# Altium PCB PCB1.PcbDoc
Units mm, origin at the board's own origin, x right, y up, seen from the top; angles counter-clockwise.
Board outline 80 x 60 mm, 2 copper layers (Top Layer, Bottom Layer); 42 components, 34 nets, 139 pads, 12 vias.
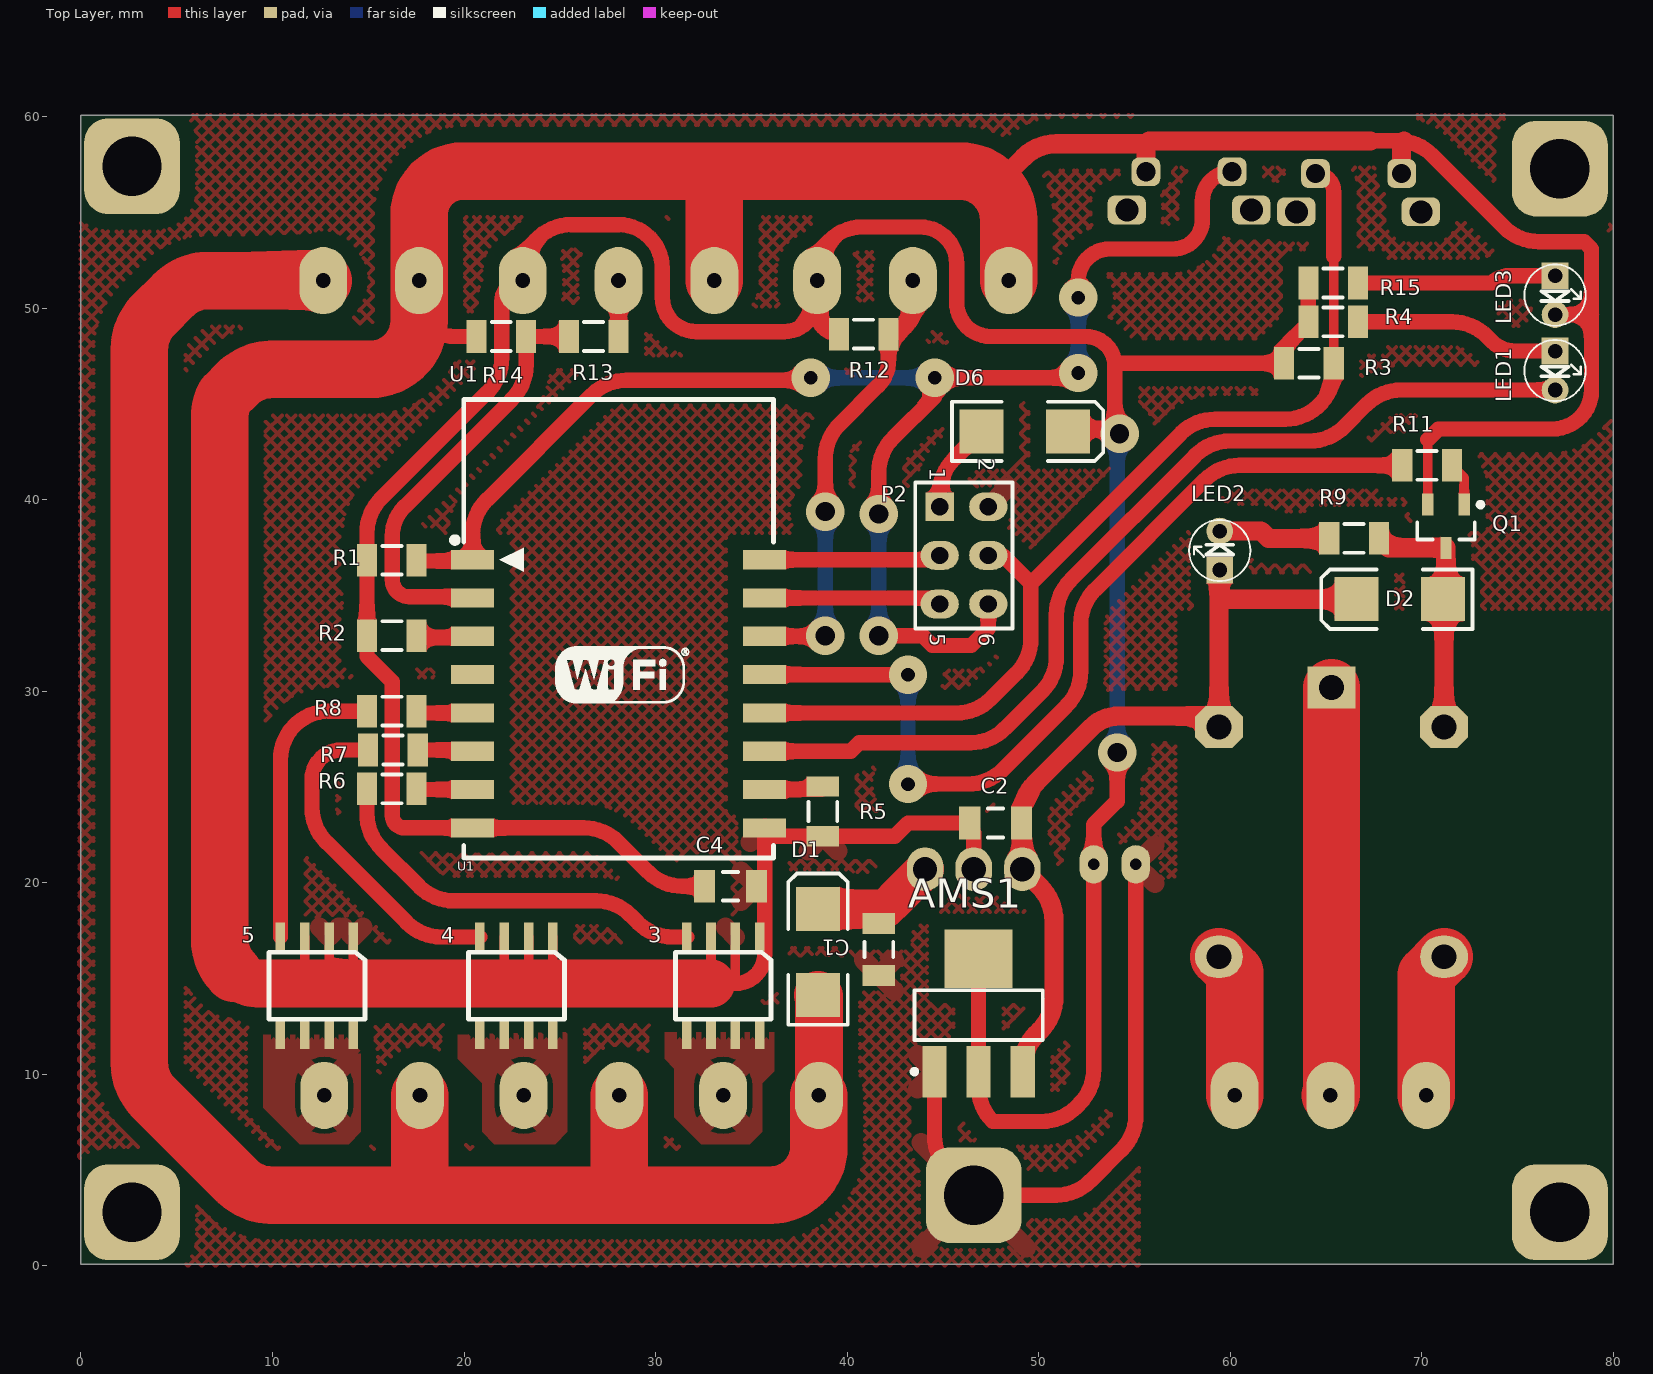
[diagram p0: Top Layer view]
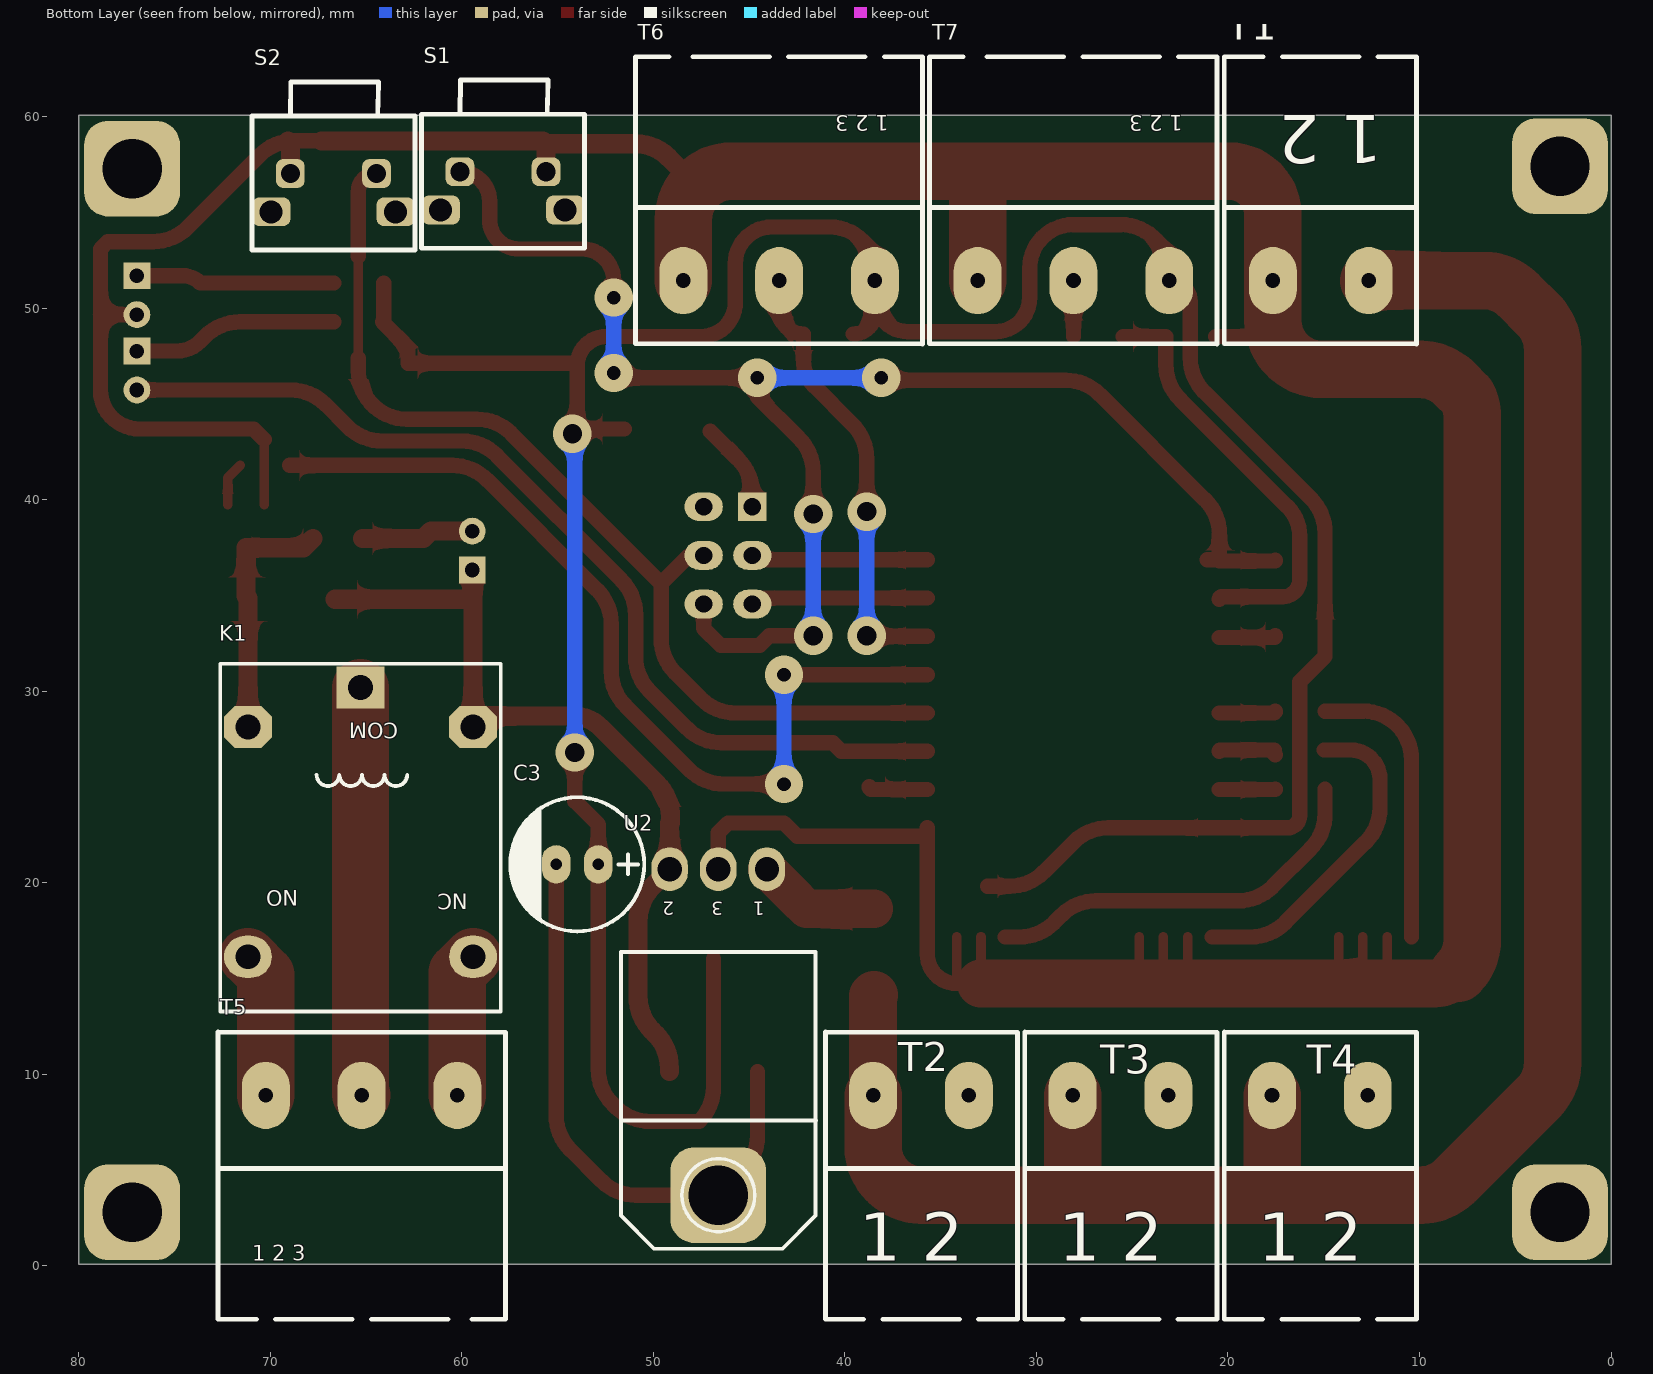
[diagram p1: Bottom Layer view, seen from below]
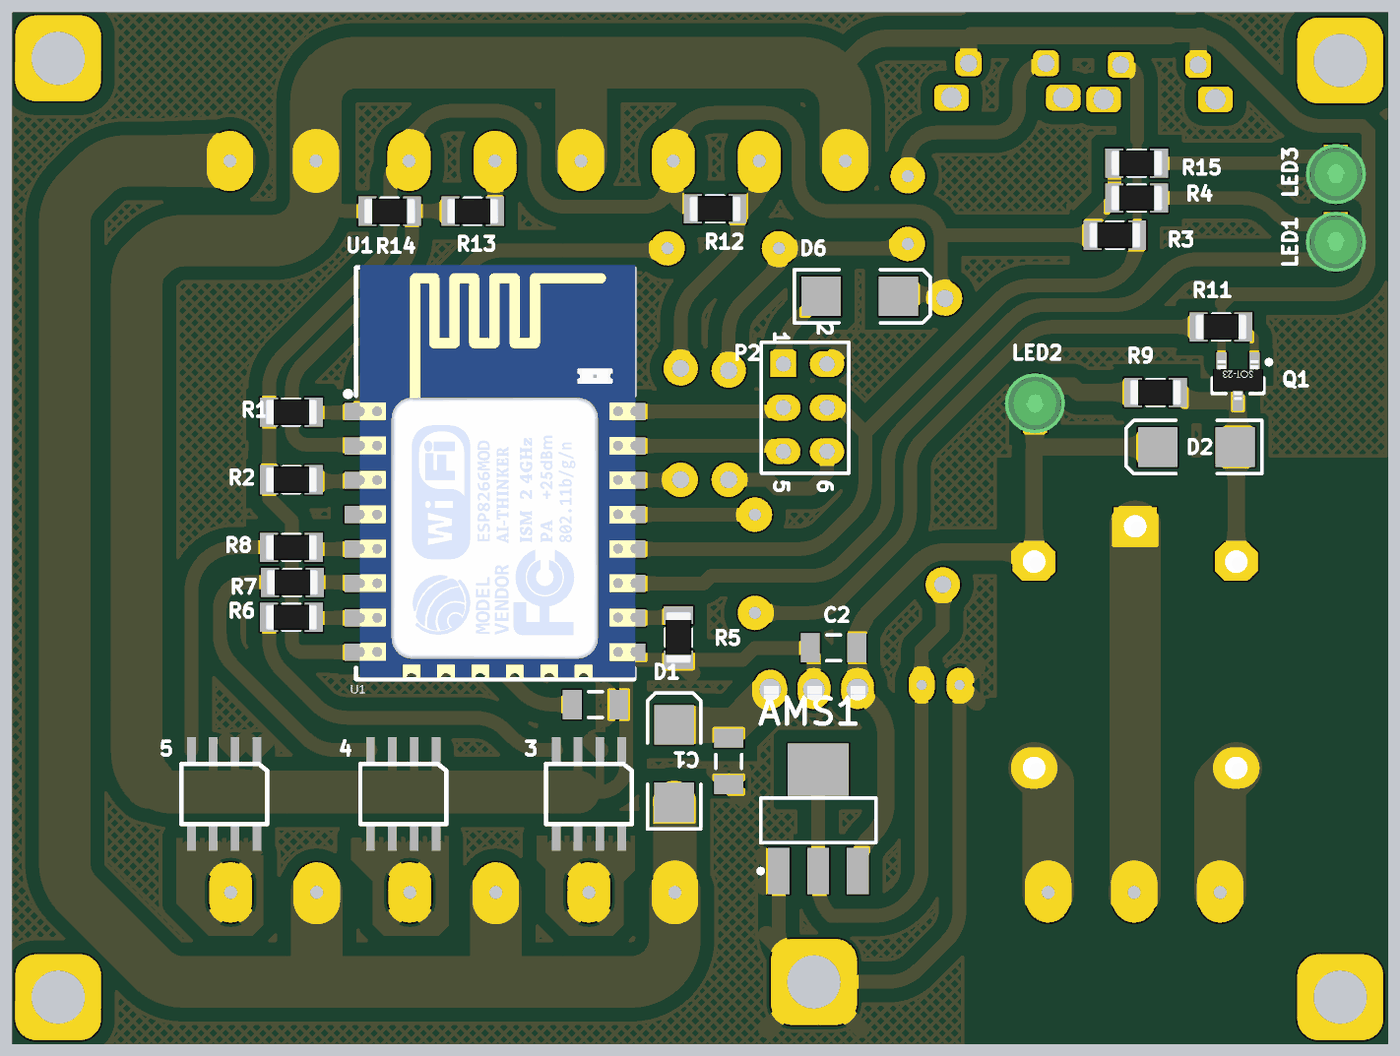
[diagram p2: 3D render of the assembled board from above, using the file's embedded part models]

## Layer stack, top to bottom
Top Solder: solder mask 0.0102, Solder Resist, Dk 3.5
Top Layer: signal copper 0.0356
Dielectric 1: dielectric 0.32, FR-4, Dk 4.8
Bottom Layer: signal copper 0.0356
Bottom Solder: solder mask 0.0102, Solder Resist, Dk 3.5

## Board outline
0,0.071 0,60.071 80,60.071 80,0.071

## Design rules (kind name [scope] priority, off if disabled: settings)
Clearance [All] p1: gap=0.8 ignorepadtopadclearanceinfootprint=FALSE
PolygonConnect [All] p1: connectstyle=Relief reliefconductorwidth=1 reliefentries=4 polygonreliefangle="45 Angle" airgapwidth=0.254
RoomDefinition Sheet2 [InComponentClass('Sheet2')] p1: confinementstyle=ConfineIn formatcopy=TRUE lockcomponents=FALSE outline -42.545,-58.928 8.255,-58.928 8.255,-33.528 -42.545,-33.528
RoutingVias [All] p1: holewidth=0.711 width=1.27 viastyle="Through Hole" minholewidth=0.711 minwidth=1.27 maxholewidth=0.711 maxwidth=1.27
SolderMaskExpansion [All] p1: expansion=0.102
Width [All] p1: maxlimit=3 minlimit=0.254 preferedwidth=1.5
30 further rules are at their usual default settings.

## Components (designator, comment, footprint, x,y, rotation, side; value= is the part's Value field where it differs from the comment)
3 "TMS4426CS" sop8 35.433,17.165 r270 top
4 "TMS4426CS" sop8 24.638,17.165 r270 top
5 "TMS4426CS" sop8 14.224,17.165 r270 top
AMS1 "AMS1117" AMS1117 46.863,13.081 r270 top
C1 "Cap Semi" C1206 41.656,16.51 r90 top value=100nf
C2 "Cap Semi" C1206 47.752,23.114 r0 top value=100nf
C3 "100uF" "cap 02" 53.975,20.955 r180 bottom
C4 "Cap Semi" C1206 33.909,19.812 r180 top value=100nf
D1 "" SMB 38.481,16.383 r90 top
D2 "1N4148" SMB 68.855,34.798 r180 top
D6 "D Schottky" SMB 49.276,43.561 r0 top
K1 "Relay" "Relay 18.85x15.35x15.70" 65.29,23.154 r0 bottom
LED1 "Red" LED-3mm 76.962,46.736 r270 top
LED2 "Red" LED-3mm 59.457,37.338 r90 top
LED3 "Red" LED-3mm 76.962,50.673 r270 top
P2 "Header 3X2" HDR2X3 44.831,39.624 r270 top
Q1 "BC817" SOT23_BEC_N 71.268,38.608 r270 top
R1 "10k" "RES 1206 (3216X08L)" 14.93,36.83 r0 top
R2 "10k" "RES 1206 (3216X08L)" 14.93,32.893 r0 top
R3 "10k" "RES 1206 (3216X08L)" 62.809,47.117 r0 top
R4 "1k" "RES 1206 (3216X08L)" 64.079,49.276 r0 top
R5 "1k" "RES 1206 (3216X08L)" 38.735,25.019 r270 top
R6 "330R" "RES 1206 (3216X08L)" 17.526,24.892 r180 top
R7 "330R" "RES 1206 (3216X08L)" 17.582,26.924 r180 top
R8 "330R" "RES 1206 (3216X08L)" 17.526,28.956 r180 top
R9 "1K" "RES 1206 (3216X08L)" 67.768,37.973 r180 top
R11 "330R" "RES 1206 (3216X08L)" 71.578,41.783 r180 top
R12 "10K" "RES 1206 (3216X08L)" 42.164,48.641 r180 top
R13 "10K" "RES 1206 (3216X08L)" 25.471,48.514 r0 top
R14 "10K" "RES 1206 (3216X08L)" 20.645,48.514 r0 top
R15 "1K" "RES 1206 (3216X08L)" 66.675,51.308 r180 top
S1 "Switch PB" button_R 53.601,60.118 r90 bottom
S2 "Switch PB" button_R 62.452,60.023 r90 bottom
T1 "Phoenix terminal" "phoenix terminal 2" 10.16,63.119 r0 bottom
T2 "Phoenix terminal" "phoenix terminal 2" 41.021,-2.794 r180 bottom
T3 "Phoenix terminal" "phoenix terminal 2" 30.607,-2.794 r180 bottom
T4 "Phoenix terminal" "phoenix terminal 2" 20.193,-2.794 r180 bottom
T5 "Phoenix terminal" "phoenix terminal 3" 72.724,-2.794 r180 bottom
T6 "Phoenix terminal" "phoenix terminal 3" 35.941,63.119 r0 bottom
T7 "Phoenix terminal" "phoenix terminal 3" 20.574,63.119 r0 bottom
U1 "ESP8266 ESP_12" "ESP8266 ESP_12" 28.072,29.861 r0 top
U2 "L78XXCV" "78XXCV - Right" 46.609,20.701 r0 bottom

## Footprints (in the part's own frame and the unit in brackets; to place one, negate y for a bottom-side part, rotate by r counter-clockwise, add the part's x,y. Pads: shape width x height; smd on the part's side, far side on the other; paste and mask are expansions set on the pad)
"78XXCV - Right" [mil] "Right Angle"
  oval 75x90 hole 50: 1(-100,0) 2(100,0) 3(0,0)
  silkscreen extent -201,170 200,780, body extent -198,-8 202,776, height 175
AMS1117 [mm]
  rect 2.7x1.27 smd: 1(2.95,2.3) 2(2.95,-2.3) 3(2.95,0)
  rect 3.048x3.556 smd: 3(-2.95,0)
  silkscreen extent -1.3,-3.47 3.07,3.35, body extent -1.85,-3.35 1.85,3.35, height 1.7
button_R [mm]
  rrect50% 1.5x1.5 hole 1: 1(-3,2) 2(-3,6.5)
  rrect50% 1.5x2 hole 1.2: 3(-5,1) 4(-5,7.5)
  silkscreen extent -7,0 1.78,8.51
C1206 [mm] "Chip Capacitor, Body 3.2x1.6mm, IPC High Density"
  rect 1.1x1.7 smd: 1(-1.35,0) 2(1.35,0)
  silkscreen extent -0.4,-0.75 0.4,0.75, body extent -1.7,-0.9 1.7,0.9, height 1.3
"cap 02" [mm]
  oval 1.5x2 hole 0.6: 1(1.1,0) 2(-1.1,0)
  silkscreen extent -3.5,-3.5 3.5,3.5
"ESP8266 ESP_12" [mm] "ESP8266 ESP-12"
  rect 2.25x1 smd: 1(-7.625,7) 2(-7.625,5) 3(-7.625,3) 4(-7.625,1) 5(-7.625,-1) 6(-7.625,-3) 7(-7.625,-5) 8(-7.625,-7) 9(7.625,-7) 10(7.625,-5) 11(7.625,-3) 12(7.625,-1) 13(7.625,1) 14(7.625,3) 15(7.625,5) 16(7.625,7)
  silkscreen extent -8.7,-8.57 8.08,15.37, body extent -7.86,-8.52 8.16,15.51, height 3.82
HDR2X3 [mm] "Connector; Header; 3x2 Position"
  rect 1.5x1.5 hole 0.9: 1(0,0)
  oval 1.5x2 hole 0.9: 2(0,2.54) 3(2.54,0) 4(2.54,2.54) 5(5.08,0) 6(5.08,2.54)
  silkscreen extent -1.27,-1.27 6.35,3.81
LED-3mm [mil]
  rect 55x55 hole 30: 1(-40,0)
  round 55 hole 30: 2(40,0)
  silkscreen extent -63,-63 63,63, body extent -69,-69 69,69, height 154
"phoenix terminal 2" [mil] "2 terminals"
  oval 98.43x137.8 hole 30: 1(98.15,460) 2(295,460)
  silkscreen extent 0,0 395,591
"phoenix terminal 3" [mil] "3 terminals"
  oval 98.43x137.8 hole 30: 1(98.15,460) 2(295,460) 3(491.85,460)
  silkscreen extent 0,0 591,591
"Relay 18.85x15.35x15.70" [mm]
  rect 2.5x2.2 hole 1.3: 1(0,-7.025)
  oval 2.5x2.2 hole 1.3: 2(-5.875,7.025) 3(5.875,7.025)
  oct 2.5x2.2 hole 1.3: 4(-5.875,-4.975) 5(5.875,-4.975)
  silkscreen extent -7.32,-8.27 7.32,9.87, body extent -7.37,-8.71 7.63,9.99, height 15.7
"RES 1206 (3216X08L)" [mm] "Chip Resistor, 2-Leads, Body 3.2x1.6mm, IPC High Density _ (0.125 W)"
  rect 1.05x1.7 smd: 1(0,0) 2(2.596,0)
  silkscreen extent 0.8,-0.75 1.8,0.75, body extent -0.23,-0.76 2.82,0.76, height 0.6
SMB [mm] "DO-214-AA/SMB; 2 C-Bend Leads; Body 5.3 x 3.6 mm, inc. leads (LxW)"
  rect 2.3x2.3 smd: 1(-2.25,0) 2(2.25,0)
  silkscreen extent -3.8,-1.55 4.1,1.55
sop8 [mm]
  rect 1.5x0.5 smd: 1(0,0) 2(0,-1.27) 3(0,-2.54) 4(0,-3.81) 5(5.1,-3.81) 6(5.1,-2.54) 7(5.1,-1.27) 8(5.1,0)
  silkscreen extent 0.8,-4.4 4.3,0.6
SOT23_BEC_N [mm] "SOT23, 3-Leads, Body 2.9x1.3mm, Pitch 0.95mm, Lead Span 2.4mm, IPC Medium Density"
  rect 1.15x0.6 smd: 1(-1.125,0.95) 2(-1.125,-0.95) 3(1.125,0)
  silkscreen extent -1.25,-1.5 0.7,1.93, body extent -1.23,-1.45 1.07,1.45, height 1

## Part data
AMS1: "LDO 3.3V/5V/12V"
C1 C2 C4: "Capacitor (Semiconductor SIM Model)", LatestRevisionDate=29-May-2009, LatestRevisionNote="IPC-7351 Footprint Added.", PackageDescription="Chip Capacitor", PackageReference=C1206, Published=8-Jun-2000, Publisher="Altium Limited"
C3: library part Cap-Polar, "Polar Capacitor", Voltage=16V, Adding Date=1387/12/20, Designer="Saeid Jorablo", Organazation=ControTec
D1: library part "D Schottky", Code_JEDEC=DO-214-AA, LatestRevisionDate=17-Jul-2002, LatestRevisionNote="Re-released for DXP Platform.", PackageDescription="DO-214-AA/SMB; 2 C-Bend Leads; Body 5.3 x 3.6 mm, inc. leads (LxW)", PackageReference=SMB, Published=8-Jun-2000, Publisher="Altium Limited"
D2: library part "Diode 1N4148", "High Conductance Fast Diode", Code_JEDEC=DO-204-AH, ComponentLink1Description="Manufacturer Link", ComponentLink1URL=http://www.fairchildsemi.com/, ComponentLink2Description=Datasheet, ComponentLink2URL=http://www.fairchildsemi.com/ds/1N%2F1N4148.pdf, DatasheetVersion=1997, LatestRevisionDate=17-Jul-2002, LatestRevisionNote="Re-released for DXP Platform.", PackageDescription="Diode, Axial; Body 3.8 x 1.9 mm (LxDia. max), Lead Dia. 0.53 mm (max)", PackageReference=DO-35, Published=8-Jun-2000, Publisher="Altium Limited"
D6: "Schottky Diode", Code_JEDEC=DO-214-AA, LatestRevisionDate=17-Jul-2002, LatestRevisionNote="Re-released for DXP Platform.", PackageDescription="DO-214-AA/SMB; 2 C-Bend Leads; Body 5.3 x 3.6 mm, inc. leads (LxW)", PackageReference=SMB, Published=8-Jun-2000, Publisher="Altium Limited"
K1: "SPDT Relay", Company=E.P.I.L, Design_Date=2011/10/31, Designer="Eng. Saeid Jorablo"
LED1 LED2 LED3: library part LED, "LED", Adding Date=1387/12/22, Color=Red, Designer="Saeid Jorablo", Organazation=ControTec, Size="SMD 1206"
P2: "Header, 3-Pin, Dual row", LatestRevisionDate=17-Jul-2002, LatestRevisionNote="Re-released for DXP Platform.", Publisher="Altium Limited"
Q1: library part NPN, "NPN Bipolar Transistor", LatestRevisionDate=29-May-2009, LatestRevisionNote="IPC-7351 Footprint Added.", PackageDescription="3-Pin SOT-23 Package 0.95 mm Pitch, 2.4 mm Lead Span", PackageReference=SOT-23B, PackageVersion=Aug-1999, Published=8-Jun-2000, Publisher="Altium Limited"
R1 R2 R3 R4 R5 R6 R7 R8 R9 R11 R12 R13 R14 R15: library part Resistor, "Resistor", Power="1/8 W", Tolerance=5%
S1 S2: "Push Button Switch"
T1 T2 T3 T4: library part "Phoenix terminal 2", "Terminal 2 Pin", ComponentLinkURL=www.picpars.com, Designer="Seyed Mohsen Ghasemain", E-mail=picpars@gmail.com
T5 T6 T7: library part "Phoenix terminal 3", "Terminal 3 Pin", ComponentLinkURL=www.picpars.com, Designer="Seyed Mohsen Ghasemain", E-mail=picpars@gmail.com
U1: "ESP8266 ESP-12", IC=ESP8266-EX, LatestReviewer="Zion Blue", LatestRevisionData=14-Apr-2015, LatestRevisionNote="Include 3D body and Footprint", Published=14-Apr-2015, Publisher="Cynetik Group", Vendor=Ai-thinker
U2: "Fixed Voltage Regulator", Adding Date=1387/01/06, Company=ControTec, Designer="Saeid Jorablo"

## Free pads (board coordinates)
  rrect50% 5x5 hole 3.1: 1(2.667,57.404) 2(2.667,2.794) 3(77.216,2.794) 4(77.216,57.277) 5(46.609,3.683)

## Via types
v1: diameter 2, hole 1, Top Layer to Bottom Layer, 6 vias
v2: diameter 2, hole 0.711, Top Layer to Bottom Layer, 6 vias

## Nets (pads, with @x,y where several pads share a name; then routed paths per layer and width w, separated by ;. In a path a pad name is that pad's centre, name@x,y a point inside that pad or via, vN(x,y) a via of type N, cw(c..) or ccw(c..) an arc to the next point about the centre after c; other vN are vias at no path point)
+3.3: AMS1.3 C3.1 C4.2 D6.2 R1.1 R2.1 R3.1 R4.1 R12.2 R15.2 T6.1 T7.1 U1.8 | length 166.3
  Top Layer w0.8: 16.891,22.86 cw(c16.891,23.495) 16.256,23.495 16.256,30.48 14.93,31.806 R2.1 R1.1 14.93,38.262 cw(c17.47,38.262) 15.674,40.058 21.227,45.611 ccw(c19.431,47.407) 21.971,47.407 21.971,50.339 cw(c23.067,50.339) T7.1 23.067,51.816 cw(c25.607,51.816) 25.607,54.356 28.067,54.356 cw(c28.067,52.07) 30.353,52.07 30.353,50.546 ccw(c32.131,50.546) 32.131,48.768 36.703,48.768 ccw(c36.703,50.499) T6.1@38.434,50.499 ; 16.891,22.861 U1.8 26.252,22.861 cw(c26.252,20.321) 28.048,22.117 29.609,20.556 ccw(c31.405,22.352) 31.405,19.812 C4.2 ; R12.2 cw(c39.568,49.775) 38.434,49.775 T6.1@38.434,50.499 ; AMS1.3@46.863,16.031 46.863,10.131 46.863,9.324 ccw(c49.403,9.324) 47.607,7.528 50.159,7.528 ccw(c50.159,10.068) 51.955,8.272 52.131,8.448 ccw(c50.335,10.244) 52.875,10.244 C3.1 52.875,23.03 54.102,24.257 v1(54.102,26.797) ; D6.2@51.526,43.688 v1@53.975,43.688 ; v1(54.229,43.434) v1@53.975,43.688 ; R4.1 R15.2 ; R4.1@64.135,49.276 62.809,47.95 R3.1 54.102,47.117 53.975,46.99 ; T6.1@38.434,50.499 T6.1 38.434,51.896 cw(c40.767,51.896) 40.767,54.229 43.815,54.229 cw(c43.815,52.324) 45.72,52.324 45.72,50.292 ccw(c47.498,50.292) 46.254,49.022 ccw(c47.498,50.292) 47.498,48.514 52.451,48.514 cw(c52.451,46.99) 53.975,46.99 ; v1@53.975,43.688 53.975,46.99
  Bottom Layer w0.8: v1(54.102,26.797) v1@54.102,43.18 ; v1@54.229,43.18 v1(54.229,43.434)
+5: AMS1.1 C2.2 D2.2 K1.4 LED2.1 U2.2 | length 42.9
  Top Layer w1: C2.2 49.102,23.412 cw(c51.642,23.412) 49.846,25.208 52.705,28.067 cw(c54.238,26.534) 52.706,28.068 cw(c54.238,26.534) 54.238,28.702 58.842,28.702 K1.4 59.415,34.65 59.436,34.671 ; C2.2@49.149,23.114 U2.2 50.056,19.794 cw(c48.26,17.998) 50.8,17.998 50.8,14.059 cw(c48.26,14.059) 50.056,12.263 49.907,12.114 ccw(c51.703,10.318) 49.163,10.318 AMS1.1 ; LED2.1 59.436,36.301 59.436,34.671 ; D2.2 59.563,34.798 59.436,34.671
+12: D1.1 T1.1 T2.1 T3.1 T4.1 | length 107.4
  Top Layer w2.5: D1.1 38.528,14.086 T2.1
  Top Layer w3: T1.1 6.64,51.435 ccw(c6.64,48.895) 4.844,50.691 3.792,49.639 ccw(c5.588,47.843) 3.048,47.843 3.048,10.577 ccw(c5.588,10.577) 3.792,8.781 8.146,4.427 ccw(c9.942,6.223) 9.942,3.683 17.526,3.683 ; T4.1 17.7,3.857 17.526,3.683 ; T3.1 28.114,3.763 28.194,3.683 ; T2.1 38.528,6.223 cw(c35.988,6.223) 35.988,3.683 28.194,3.683 ; 17.526,3.683 28.194,3.683
ADC: R13.1 R14.2 U1.2 | length 22.4
  Top Layer w0.8: U1.2@20.447,34.797 ccw(c20.319,34.797) 20.319,34.925 17.145,34.925 cw(c17.145,35.814) 16.256,35.814 16.256,38.1 cw(c18.402,38.1) 16.885,39.618 22.497,45.23 ccw(c20.701,47.026) 23.241,47.026 R14.2 R13.1
DHT: R12.1 T6.2 U1.14 | length 23.6
  Top Layer w0.8: U1.14 38.449,32.861 ccw(c38.449,32.893) 38.481,32.893 v1(38.862,32.893) ; v1(38.862,39.37) 38.862,42.128 cw(c41.402,42.128) 39.606,43.924 41.625,45.943 ccw(c40.324,47.244) 42.164,47.244 R12.1 ccw(c42.164,49.911) 43.434,49.911 T6.2
  Bottom Layer w0.8: v1(38.862,32.893) v1(38.862,39.37)
DTR: P2.4 R3.2 S2.1 U1.12 | length 53.1
  Top Layer w0.5: R3.2@65.405,47.371 65.405,52.705
  Top Layer w0.8: U1.12 45.716,28.861 ccw(c45.716,31.401) 47.512,29.605 48.85,30.943 ccw(c47.053,32.739) 49.593,32.739 49.593,35.623 ; P2.4 48.133,37.084 49.593,35.623 ; S2.1 cw(c64.452,56.07) 65.405,56.07 65.405,52.705 ; R3.2@65.405,47.371 R3.2 65.405,46.736 cw(c62.865,46.736) 62.865,44.196 59.218,44.196 ccw(c59.218,41.656) 57.422,43.452 49.593,35.623
GND: 3.1 3.2 3.3 4.1 4.2 4.3 5.1 5.2 5.3 AMS1.2 C1.1 C2.1 C3.2 C4.1 LED3.2 P2.2 pad.5 Q1.2 R5.2 R14.1 S1.1 S2.2 T1.2 T6.3 T7.3 U1.9 U2.3 | length 252.4
  Top Layer w0.5: 11.557,14.732 11.684,14.859 5.3 ; 5.2 12.954,15.875 14.097,14.732 14.224,14.859 5.1 ; 21.971,14.732 22.098,14.859 4.3 ; 23.368,14.732 4.2 ; 24.638,14.732 4.1 ; 32.893,14.732 3.3 ; 34.163,14.732 3.2 ; Q1.2 70.318,43.14
  Top Layer w0.8: 17.653,49.339 17.735,49.258 ccw(c19.531,51.054) 19.531,48.514 R14.1 ; 34.163,14.732 ccw(c34.163,16.266) 35.697,16.266 U1.9 ccw(c36.135,22.861) 36.135,22.423 R5.2 42.489,22.423 43.18,23.114 46.101,23.114 46.609,22.606 U2.3 ; AMS1.2 44.563,6.781 ccw(c47.103,6.781) 45.307,4.985 pad.5 50.908,3.683 ccw(c50.908,6.223) 52.704,4.427 54.331,6.054 ccw(c52.535,7.85) 55.075,7.85 C3.2 ; 67.31,58.729 68.743,58.729 cw(c68.743,56.189) 69.067,58.708 cw(c68.743,56.189) 70.539,57.985 74.313,54.211 ccw(c76.109,56.007) 76.109,53.467 78.486,53.467 78.867,53.086 78.867,49.657 ; 70.318,43.14 70.866,43.688 76.835,43.688 ccw(c76.835,45.72) 78.867,45.72 78.867,49.657 ; LED3.2 78.867,49.657
  Top Layer w1: 47.724,56.371 49.226,57.872 cw(c50.927,56.171) 50.927,58.577 55.601,58.577 ; S1.1 55.601,58.577 ; 67.31,58.729 55.753,58.729 55.601,58.577 ; S2.2 68.952,58.593 69.067,58.708
  Top Layer w2.5: 7.983,15.258 ccw(c9.253,16.528) 8.222,15.057 ccw(c9.253,16.528) 9.253,14.732 11.557,14.732 14.097,14.732 21.971,14.732 23.368,14.732 24.638,14.732 32.893,14.732
  Top Layer w3: 7.983,15.258 cw(c9.779,17.054) 7.239,17.054 7.239,44.259 cw(c9.779,44.259) 7.507,45.395 8.167,46.056 cw(c9.963,44.259) 9.963,46.799 15.113,46.799 ccw(c15.113,49.339) 17.635,49.04 ccw(c15.113,49.339) 17.653,49.339 T1.2 17.653,54.864 cw(c19.939,54.864) 19.939,57.15 32.385,57.15 ; T7.3 33.067,56.468 32.385,57.15 ; T6.3 48.434,54.61 ccw(c45.894,54.61) 47.724,56.371 ccw(c45.894,54.61) 45.894,57.15 32.385,57.15
Ligth-1: R8.1 U1.5 | length 3
  Top Layer w0.8: R8.1 ccw(c17.621,28.956) 17.621,28.861 U1.5
Ligth-2: R7.1 U1.6 | length 3.1
  Top Layer w0.8: R7.1@17.526,26.67 R7.1@17.701,26.845 ; R7.1 20.384,26.924 cw(c20.384,26.861) U1.6
Ligth-3: R6.1 U1.7 | length 2.9
  Top Layer w0.8: R6.1 ccw(c17.557,24.892) 17.557,24.861 U1.7
Net3_4: 3.4 R6.2 | length 20.8
  Top Layer w0.8: R6.2 14.93,23.587 ccw(c17.47,23.587) 15.674,21.791 17.671,19.794 ccw(c19.467,21.59) 19.467,19.05 26.888,19.05 cw(c26.888,16.51) 28.684,18.306 29.081,17.909 ccw(c30.877,19.705) 30.877,17.165 3.4
Net3_5: 3.5 3.6 3.7 3.8 T2.2
Net4_4: 4.4 R7.2 | length 17.2
  Top Layer w0.8: R7.2 13.589,26.924 ccw(c13.589,25.4) 12.065,25.4 12.065,23.912 ccw(c14.605,23.912) 12.809,22.116 17.016,17.909 ccw(c18.812,19.705) 18.812,17.165 4.4
Net4_5: 4.5 4.6 4.7 4.8 T3.2
Net5_4: 5.4 R8.2 | length 15.2
  Top Layer w0.8: 5.4 10.414,26.416 cw(c12.954,26.416) 12.954,28.956 R8.2
Net5_5: 5.5 5.6 5.7 5.8 T4.2
NetC1_2: C1.2 D1.2 U2.1 | length 6.4
  Top Layer w2: D1.2 42.001,18.633 U2.1
NetD2_1: D2.1 K1.5 Q1.3 R9.1 | length 13.1
  Top Layer w1: R9.1 68.258,37.483 Q1.3 71.268,34.961 71.165,34.858 K1.5
NetD6_1: D6.1 P2.1 | length 4.7
  Top Layer w0.8: P2.1 44.831,40.314 cw(c47.371,40.314) 45.575,42.11 D6.1
NetK1_1: K1.1 T5.2 | length 21.3
  Top Layer w3: T5.2 65.29,8.949 K1.1
NetK1_2: K1.2 T5.3 | length 7.6
  Top Layer w3: K1.2 60.231,15.313 T5.3
NetK1_3: K1.3 T5.1 | length 7.6
  Top Layer w3: T5.1 70.231,15.195 K1.3
NetLED1_1: LED1.1 R4.2 | length 10.7
  Top Layer w0.8: R4.2 71.592,49.276 cw(c71.592,46.736) 73.388,48.532 73.66,48.26 ccw(c74.886,49.486) 74.886,47.752 LED1.1
NetLED1_2: LED1.2 U1.11 | length 51
  Top Layer w0.8: U1.11@35.713,26.845 U1.11 40.196,26.861 40.64,27.305 46.446,27.305 ccw(c46.446,29.845) 48.242,28.049 50.183,29.99 ccw(c48.387,31.786) 50.927,31.786 50.927,34 cw(c53.467,34) 51.671,35.796 58.184,42.309 cw(c59.98,40.513) 59.98,43.053 64.154,43.053 ccw(c64.154,45.593) 65.951,43.797 67.13,44.976 cw(c68.926,43.18) 68.926,45.72 LED1.2
NetLED2_2: LED2.2 R9.2 | length 5.9
  Top Layer w1: LED2.2 61.616,38.354 61.997,37.973 R9.2
NetLED3_1: LED3.1 R15.1 | length 10.4
  Top Layer w0.8: R15.1 73.66,51.308 cw(c74.58,50.388) 74.58,51.689 LED3.1
NetQ1_1: Q1.1 R11.1 | length 2.3
  Top Layer w0.5: R11.1 72.218,41.143 Q1.1
NetR2_2: R2.2 U1.3 | length 3
  Top Layer w0.8: R2.2@17.574,32.845 R2.2 ccw(c17.622,32.893) 17.622,32.797 U1.3@20.447,32.797
NetR5_1: R5.1 U1.10 | length 3.1
  Top Layer w0.8: U1.10 38.577,24.861 ccw(c38.577,25.019) R5.1
NetR13_2: R13.2 T7.2 | length 2.9
  Top Layer w0.8: R13.2 T7.2
Relay: R11.2 U1.13 | length 48.1
  Top Layer w0.8: U1.13 v2(43.18,30.861) ; v2(43.18,25.146) 46.319,25.146 ccw(c46.319,27.686) 48.115,25.89 51.453,29.228 ccw(c49.657,31.024) 52.197,31.024 52.197,33.492 cw(c54.737,33.492) 52.941,35.288 58.692,41.039 cw(c60.488,39.243) 60.488,41.783 R11.2
  Bottom Layer w0.8: v2(43.18,25.146) v2(43.18,30.861)
RST: P2.6 R1.2 S1.2 U1.1 | length 79.2
  Top Layer w0.8: R1.2 ccw(c17.559,36.83) 17.559,36.797 U1.1@20.447,36.797 ; U1.1@21.077,36.861 U1.1 20.447,38.191 cw(c22.987,38.191) 21.191,39.987 26.688,45.484 cw(c28.484,43.688) 28.484,46.228 37.973,46.228 ccw(c37.973,46.355) v2(38.1,46.355) ; v1(41.656,32.893) 43.942,32.893 44.45,32.385 46.482,32.385 47.371,33.274 P2.6 ; v1(41.656,39.243) 41.656,41.418 cw(c44.196,41.418) 42.4,43.214 44.577,45.391 v2(44.577,46.355) 51.435,46.355 51.689,46.609 v2(52.07,46.609) ; v2(52.07,50.546) 52.07,51.435 cw(c53.721,51.435) 53.721,53.086 57.023,53.086 ccw(c57.023,54.61) 57.68,53.235 ccw(c57.023,54.61) 58.398,53.953 ccw(c57.023,54.61) 58.547,54.61 58.547,55.564 cw(c60.101,55.564) S1.2
  Bottom Layer w0.8: v2(38.1,46.355) v2(44.577,46.355) ; v1(41.656,32.893) v1(41.656,39.243) v1@41.783,39.243 ; v2(52.07,46.609) v2(52.07,50.546)
RXD: P2.5 U1.15 | length 9.3
  Top Layer w0.8: U1.15 44.514,34.861 P2.5
TXD: P2.3 U1.16 | length 9.2
  Top Layer w0.8: U1.16 44.608,36.861 P2.3
pads on no net: S1.3 S1.4 S2.3 S2.4 U1.4

## Polygon pours and split planes (outlines as drawn)
GND on Top Layer "Top Layer-No Net" (hatched 45Degree grid 0.508 track 0.203, pour order 6): 0,60.071 79.883,60.071 79.883,34.29 57.15,34.29 57.15,20.32 ccw(c57.15,18.415) 55.245,18.415 55.245,0 -0.127,0
Net3_5 on Top Layer "Top Layer-No Net" (solid, pour order 4): 36.195,12.192 36.195,10.16 35.56,9.525 35.56,6.985 34.925,6.35 32.385,6.35 30.988,7.747 30.988,10.287 30.48,10.795 30.48,12.192
Net4_5 on Top Layer "Top Layer-No Net" (solid, pour order 2): 25.4,12.192 25.4,6.985 24.765,6.35 21.59,6.35 20.955,6.985 20.955,9.525 19.685,10.795 19.685,12.065
Net5_5 on Top Layer "Top Layer-No Net" (solid, pour order 0): 9.525,12.065 14.605,12.065 14.605,6.985 13.97,6.35 11.43,6.35 9.525,8.255

## Silkscreen, mask and mechanical layers (free items; w line width, h text height)
Mechanical 1:
  the board outline again, w0.254

## Text inside footprints (layer, text, board x,y; h text height)
K1: Bottom Overlay "NC" at 59.702,19.42 h0.8 r180; Bottom Overlay "NO" at 68.541,19.598 h0.8 r180; Bottom Overlay "COM" at 63.309,28.336 h0.8 r180
P2: Top Overlay "6" at 46.863,33.02 h0.8 r270; Top Overlay "5" at 44.323,33.02 h0.8 r270; Top Overlay "2" at 46.863,42.164 h0.8 r270; Top Overlay "1" at 44.323,41.656 h0.8 r270
T1: Bottom Overlay "1 2" at 11.938,60.071 h2.5 r180
T2: Bottom Overlay "1 2" at 39.243,0.254 h2.5
T3: Bottom Overlay "1 2" at 28.829,0.254 h2.5
T4: Bottom Overlay "1 2" at 18.415,0.254 h2.5
T5: Bottom Overlay "1 2 3" at 70.946,0.254 h0.8
T6: Bottom Overlay "1 2 3" at 37.719,60.071 h0.8 r180
T7: Bottom Overlay "1 2 3" at 22.352,60.071 h0.8 r180
U1: Mechanical 13 "CUTOUT POLYGON" at 20.199,44.227 h0.25; Mechanical 13 "ANTENNA AREA" at 20.199,44.735 h0.25
U2: Bottom Overlay "3" at 46.355,19.001 h0.7 r180; Bottom Overlay "2" at 48.92,19.001 h0.7 r180; Bottom Overlay "1" at 44.196,19.001 h0.7 r180